# EAGLE board Varela_Module (EAGLE 9.5.2)
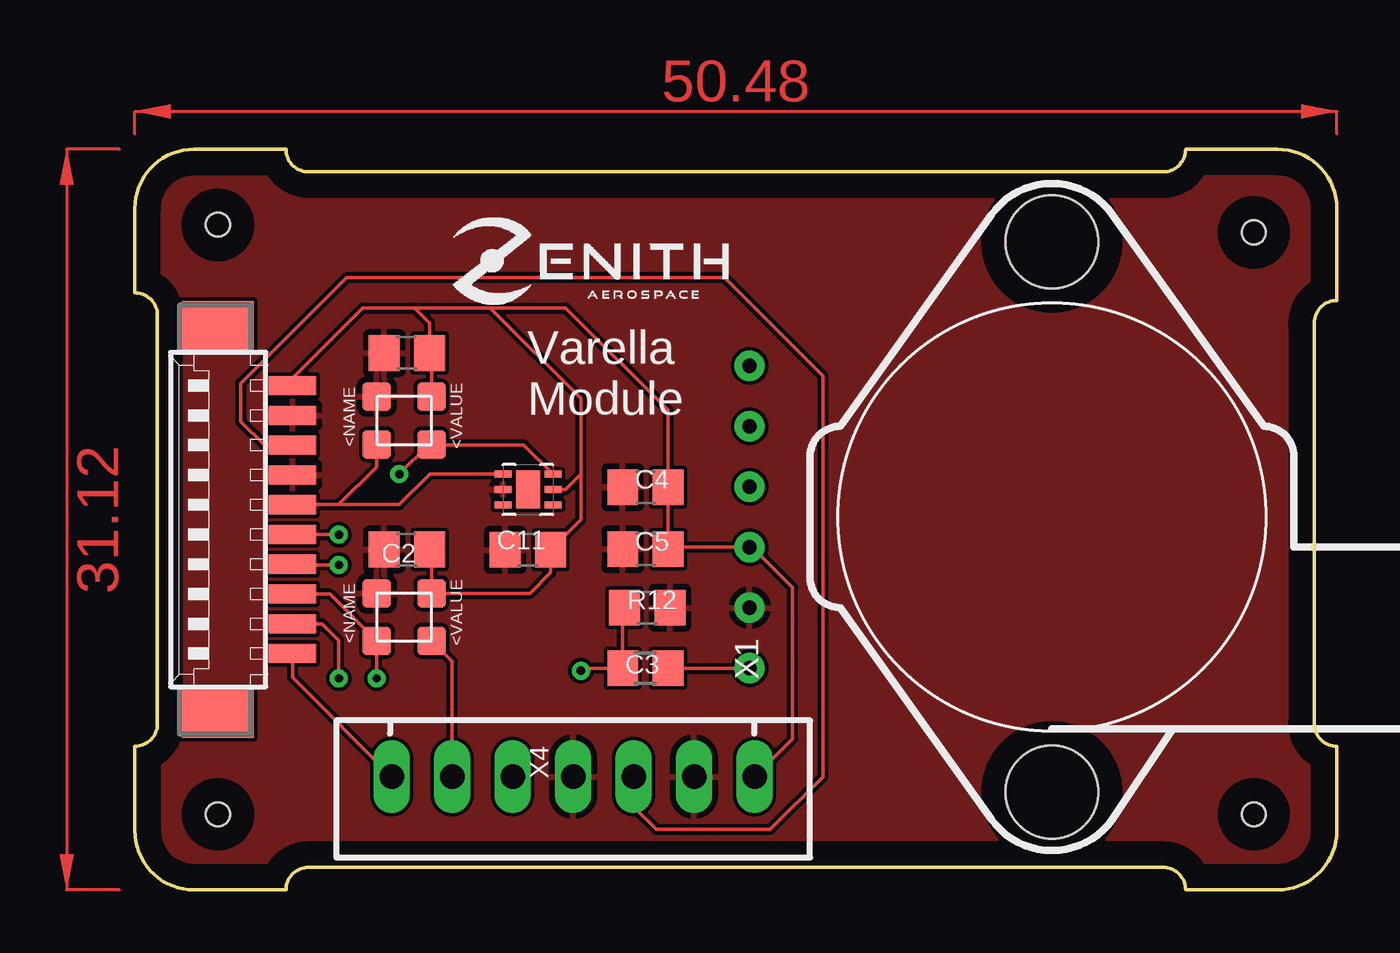
[diagram p0: board, top side]
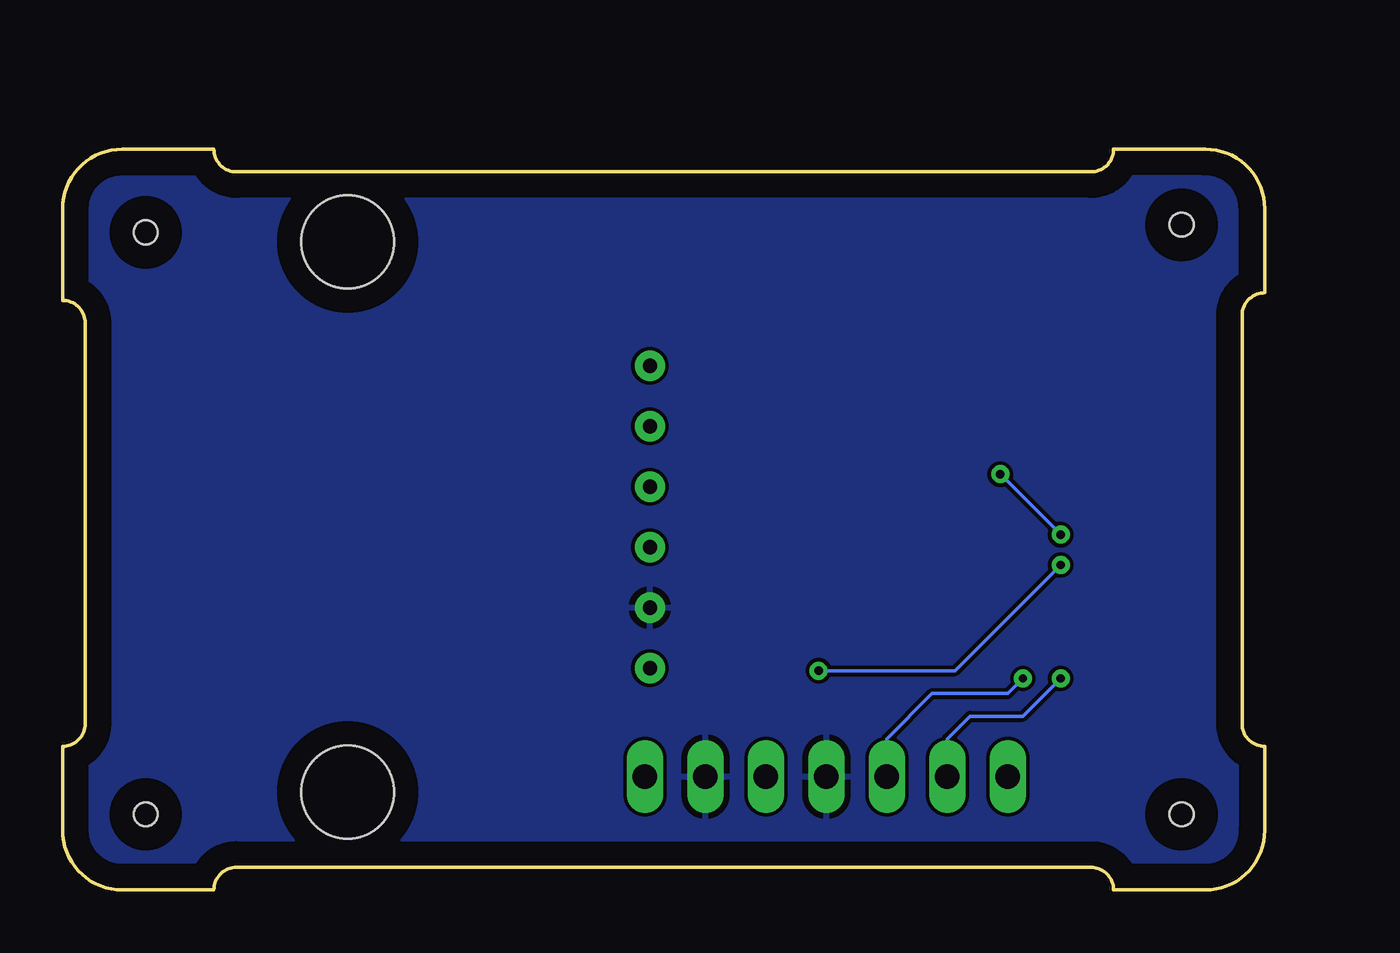
[diagram p1: board, bottom side, seen from below]

Size 50.48 x 31.12 mm. Coordinates in mm from the lower left corner, seen from the top.
Outline: 0,6.03 0,2.5 arc90 2.5,0 6.35,0 arc-90 7.3,0.95 43.18,0.95 arc-90 44.13,0 47.98,0 arc90 50.48,2.5 50.48,6.03 arc-90 49.53,6.99 49.53,23.81 arc-90 50.48,24.77 50.48,28.62 arc90 47.98,31.12 44.13,31.12 arc-90 43.18,30.16 7.3,30.16 arc-90 6.35,31.12 2.5,31.12 arc90 0,28.62 0,25.08 arc-90 0.95,24.13 0.95,6.99 arc-90 0,6.03
Copper layers (1*16): Top 0.035mm / dielectric 1.5mm / Bottom 0.035mm
Design rules "default": minimum track width 6mil, minimum drill 0.35mm, track to track 6mil, track to pad 6mil, pad to pad 6mil, via to via 6mil, smd to smd 6mil, copper to edge 40mil, drill to drill 6mil, minimum pad ring 10mil, minimum via ring 8mil, stop-mask expansion 4mil, vias tented up to drill 0mil, thermal gap 10mil
Holes 1 mm at 3.49,27.94 3.49,3.17 46.99,27.62 46.99,3.17

## Footprints (pad centres in the part's own frame; a part is rotated, then mirrored left to right if it is on the bottom)
C0805 = smd 1.3 x 1.5: 1 -0.95,0; 2 0.95,0
GUVA-C32SM = smd 1.2 x 1.2: GND 2,0; SCL 0,-2.3; SDA 0,0; VCC 2,-2.3
R0805 = smd 1.3 x 1.5: 1 -0.95,0; 2 0.95,0
TI-S-PWSON-N6 = smd 0.3 x 0.7: 1 -0.65,-1.05; 2 0,-1.05; 3 0.65,-1.05; 4 0.65,1.05; 5 0,1.05; 6 -0.65,1.05 | smd 1.6 x 1: 7 0,0
MPX5700 = drill 0.6 pad 1.27: P$1 0,0; P$2 -2.54,0; P$3 -5.08,0; P$4 -7.62,0; P$5 -10.16,0; P$6 -12.7,0 | hole 3.89: -17.905,12.7; 5.205,12.7
53261-10 = smd 0.8 x 2: 1 5.625,-2.5; 2 4.375,-2.5; 3 3.125,-2.5; 4 1.875,-2.5; 5 0.625,-2.5; 6 -0.625,-2.5; 7 -1.875,-2.5; 8 -3.125,-2.5; 9 -4.375,-2.5; 10 -5.625,-2.5 | smd 2.1 x 3: S1 8.125,0.625; S2 -8.125,0.625
JST-XH-07-PACKAGE-LONG-PAD = drill 1.016 long: 1 -7.62,0; 2 -5.08,0; 3 -2.54,0; 4 0,0; 5 2.54,0; 6 5.08,0; 7 7.62,0

## Placement (x,y rotation side)
C1  100n  [C0805]  11.43,22.55 180 top
C2  100n  [C0805]  11.43,14.3 180 top
C3  330n  [C0805]  21.52,11.86 180 top
C4  1000n  [C0805]  21.45,16.92 0 top
C5  10n  [C0805]  21.45,14.32 0 top
C11  100n  [C0805]  16.51,14.29 180 top
I2C1  GUVA-C32SM  [GUVA-C32SM]  10.17,18.72 90 top
I2C2  GUVA-C32SM  [GUVA-C32SM]  10.17,10.46 90 top
R12  750  [R0805]  21.45,9.32 0 top
U$1  HDC1080  [TI-S-PWSON-N6]  16.52,16.81 270 top
X1  [MPX5700]  25.82,9.32 270 top
X2  53261-10  [53261-10]  4.13,15.56 90 top
X4  JST-XH-07-PIN-LONG-PAD  [JST-XH-07-PACKAGE-LONG-PAD]  18.41,4.76 180 top

## Library data of the parts
C1-C5 C11 = rcl; SPICEPREFIX: C
I2C1 I2C2 = GUVA-C32SM (1)
R12 = rcl; SPICEPREFIX: R
U$1 = Texas-HDC1080
X1 = MPX5700
X2 = con-molex; MF: MOLEX; OC_FARNELL: unknown; OC_NEWARK: unknown
X4 = JST-XH-Zenith

## Nets
+3V3: C1.1 C2.1 C4.2 C5.2 C11.1 I2C1.VCC I2C2.VCC U$1.5 X1.P$3 X2.1 X4.1
+5V: X2.3 X4.3
GND: C1.2 C2.2 C3.1 C4.1 C5.1 C11.2 I2C1.GND I2C2.GND U$1.2 X1.P$2 X2.2 X2.4 X4.2 X4.4
N$1: R12.2 X1.P$1
SCL_1: I2C1.SCL U$1.6 X2.6
SCL_2: I2C2.SCL X2.9 X4.6
SDA_1: I2C1.SDA U$1.1 X2.5
SDA_2: I2C2.SDA X2.8 X4.5
V_OUT: X2.10 X4.7
V_PRESSURE: C3.2 R12.1 X2.7

## Tracks (layer width: path | path; a pad name or v marks a point on that pad's centre or on a via)
+3V3
  Top 0.152: C2.1 12.46,14.21 I2C2.VCC 16.59,12.47 17.46,13.34 C11.1 | C2.1 12.38,14.93 | 17.14,13.97 C11.1 | C2.1 12.38,14.91 | C1.1 12.38,22.86 | 12.38,22.86 12.38,23.19 | X4.1 27.62,6.35 27.62,12.7 25.92,14.4 X1.P$3 22.4,14.4 C5.2 C4.2 22.4,20.15 18.1,24.45 14.92,24.45 | 17.58,16.83 U$1.5 18.09,16.82 18.73,17.46 | 12.7,20.96 I2C1.VCC 12.46,22.77 12.38,22.86 | X2.1 6.63,21.5 9.58,24.45 11.75,24.45 | 11.75,24.45 14.92,24.45 | 12.38,23.5 C1.1 | C1.1 12.38,23.82 11.75,24.45 | C11.1 18.73,15.56 18.73,17.46 | 14.92,24.45 18.73,20.64 18.73,17.46
+5V
  Top 0.152: X4.3 20.95,3.49 21.91,2.54 26.67,2.54 28.89,4.76 28.89,21.59 24.77,25.72 8.89,25.72 4.45,21.27 4.45,19.69 5.45,18.68 X2.3
GND
  Top 0.152: X4.2 23.49,3.49
  pour Top: -4.76,35.56 -4.76,-0.63 -4.45,-0.95 51.43,-0.95 52.7,0.32 52.7,33.34 50.48,35.56
  pour Bottom: -5.71,35.24 -5.71,0.45 arc45 -5.4,-0.32 51.35,-0.32 arc45 53.12,0.41 53.98,1.27 53.98,30.4 arc45 53.24,32.16 50.48,34.93 -4.95,34.93 arc-45
N$1
  Top 0.152: R12.2 X1.P$1
SCL_1  (via drill 0.35)
  Top 0.152: 12.46,18.41 I2C1.SCL 12.48,18.7 | X2.6 6.64,14.92 v8.57,14.92 | 17.46,17.57 U$1.6 16.33,18.7 12.48,18.7 | v11.11,17.46 12.35,18.7 12.48,18.7
  Bottom 0.152: v8.57,14.92 v11.11,17.46
SCL_2  (via drill 0.35)
  Top 0.152: 12.46,10.15 I2C2.SCL 13.33,9.6 X4.6 | v8.57,8.89 8.57,10.48 7.87,11.18 X2.9
  Bottom 0.152: X4.6 13.33,6.35 12.38,7.3 10.16,7.3 v8.57,8.89
SDA_1
  Top 0.152: 15.56,17.56 U$1.1 12.39,17.47 11.11,16.18 8.57,16.18 | 10.38,18.5 I2C1.SDA 10.17,17.78 8.57,16.18 | X2.5 8.57,16.18
SDA_2  (via drill 0.35)
  Top 0.152: v10.16,8.89 I2C2.SDA 8.2,12.43 X2.8
  Bottom 0.152: X4.5 15.88,6.35 13.97,8.26 10.79,8.26 v10.16,8.89
V_OUT
  Top 0.152: X4.7 6.63,8.93 X2.10
V_PRESSURE  (via drill 0.35)
  Top 0.152: C3.2 20.49,11.78 R12.1 18.84,9.32 v18.73,9.21 | v8.57,13.65 6.66,13.65 X2.7
  Bottom 0.152: v18.73,9.21 13.02,9.21 v8.57,13.65
(copper drawn outside any net)
  shapes: Top area x2

## Text on the board
tPlace: Varella / Module | C:/Users/marcu/Desktop/Arquivo/Marcus/zenith/Logo_b.bmp | G:/Zenith/GENUS/Logo_1000.bmp